# Altium PCB RaspberryPi.PcbDoc
Units mm, origin at the board's own origin, x right, y up, seen from the top; angles counter-clockwise.
Board outline 66 x 57.75 mm, 2 copper layers (Top Layer, Bottom Layer), stack 1.532 mm thick; 53 components, 56 nets, 340 pads, 188 vias.
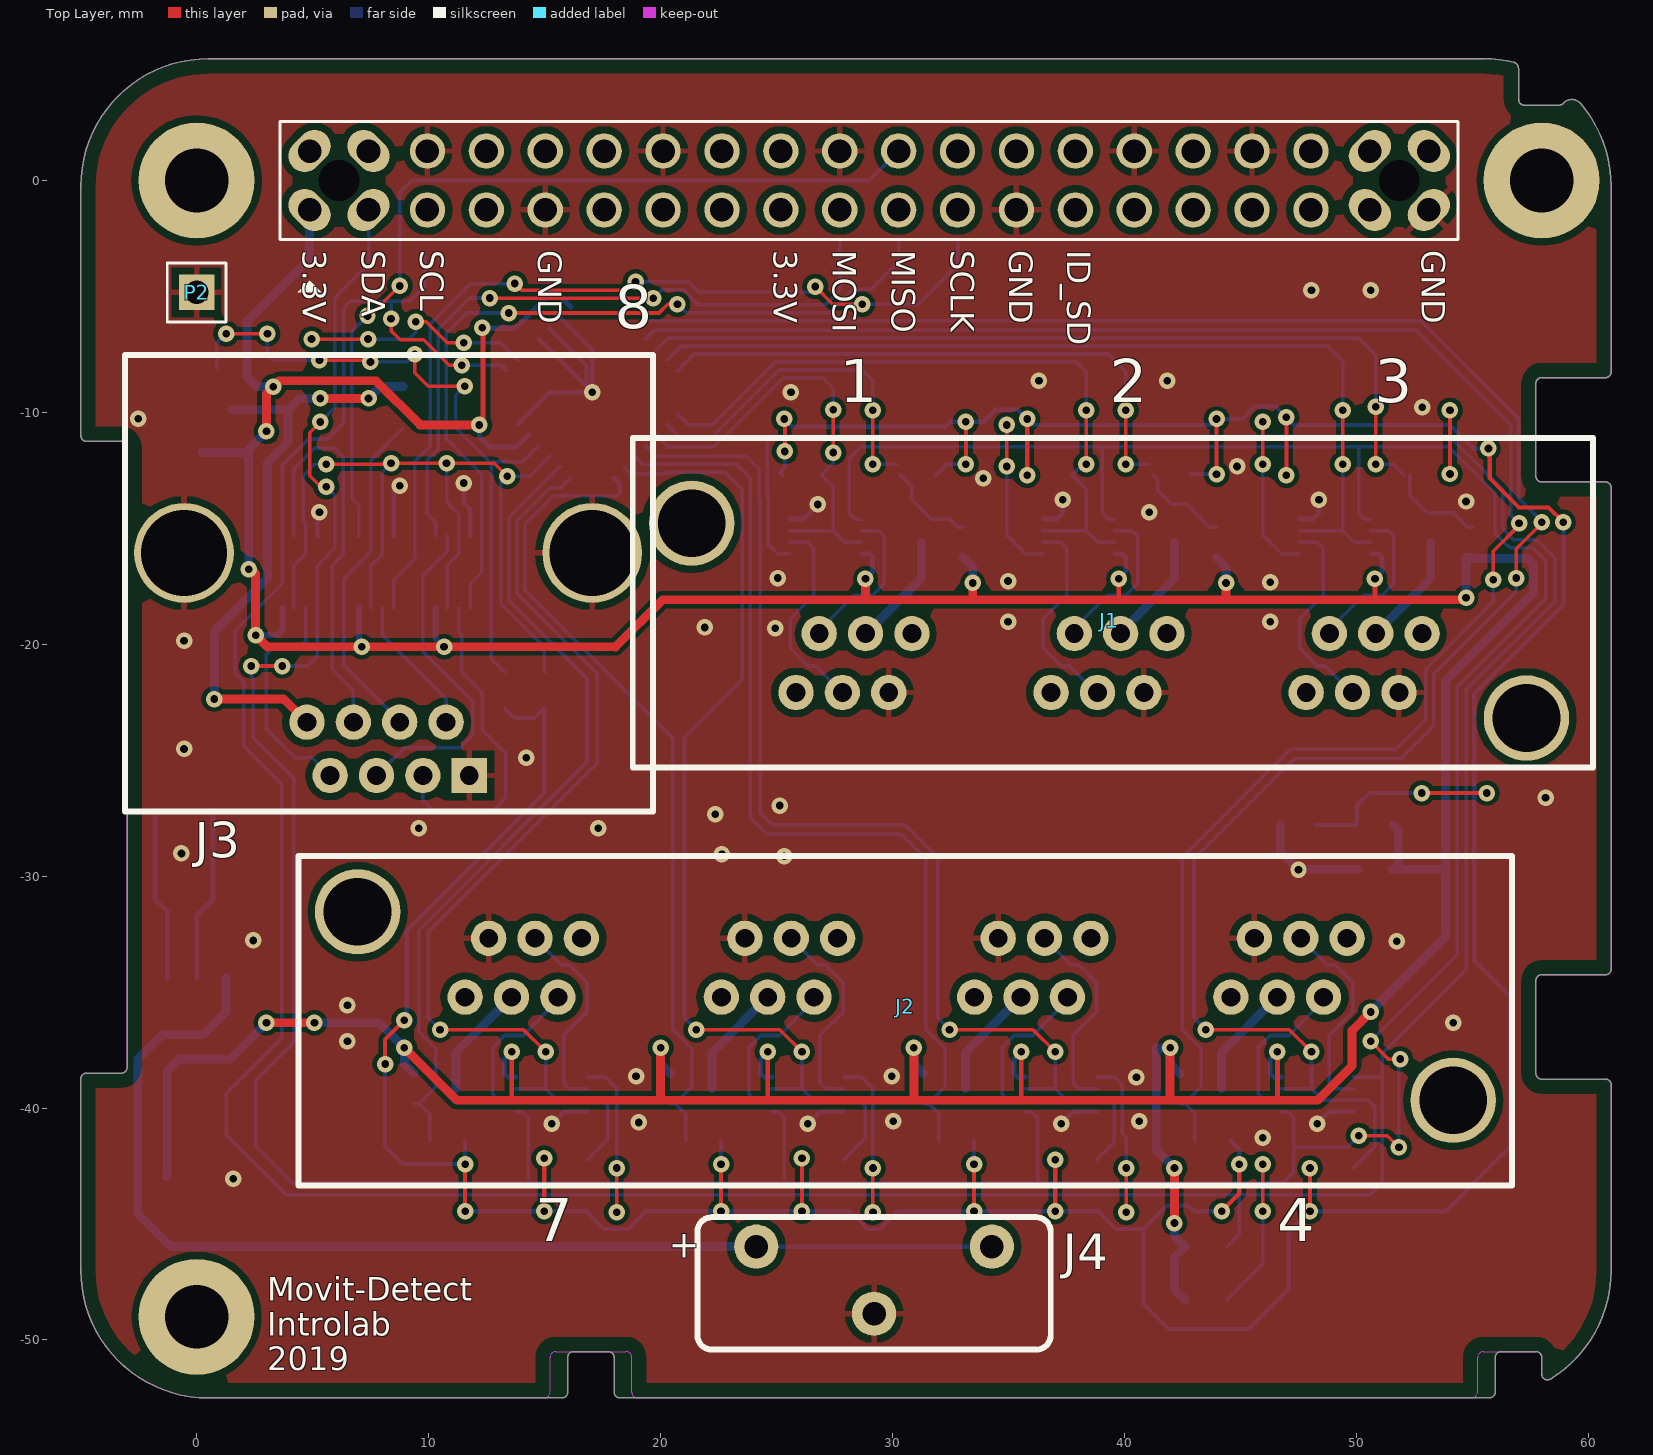
[diagram p0: Top Layer view]
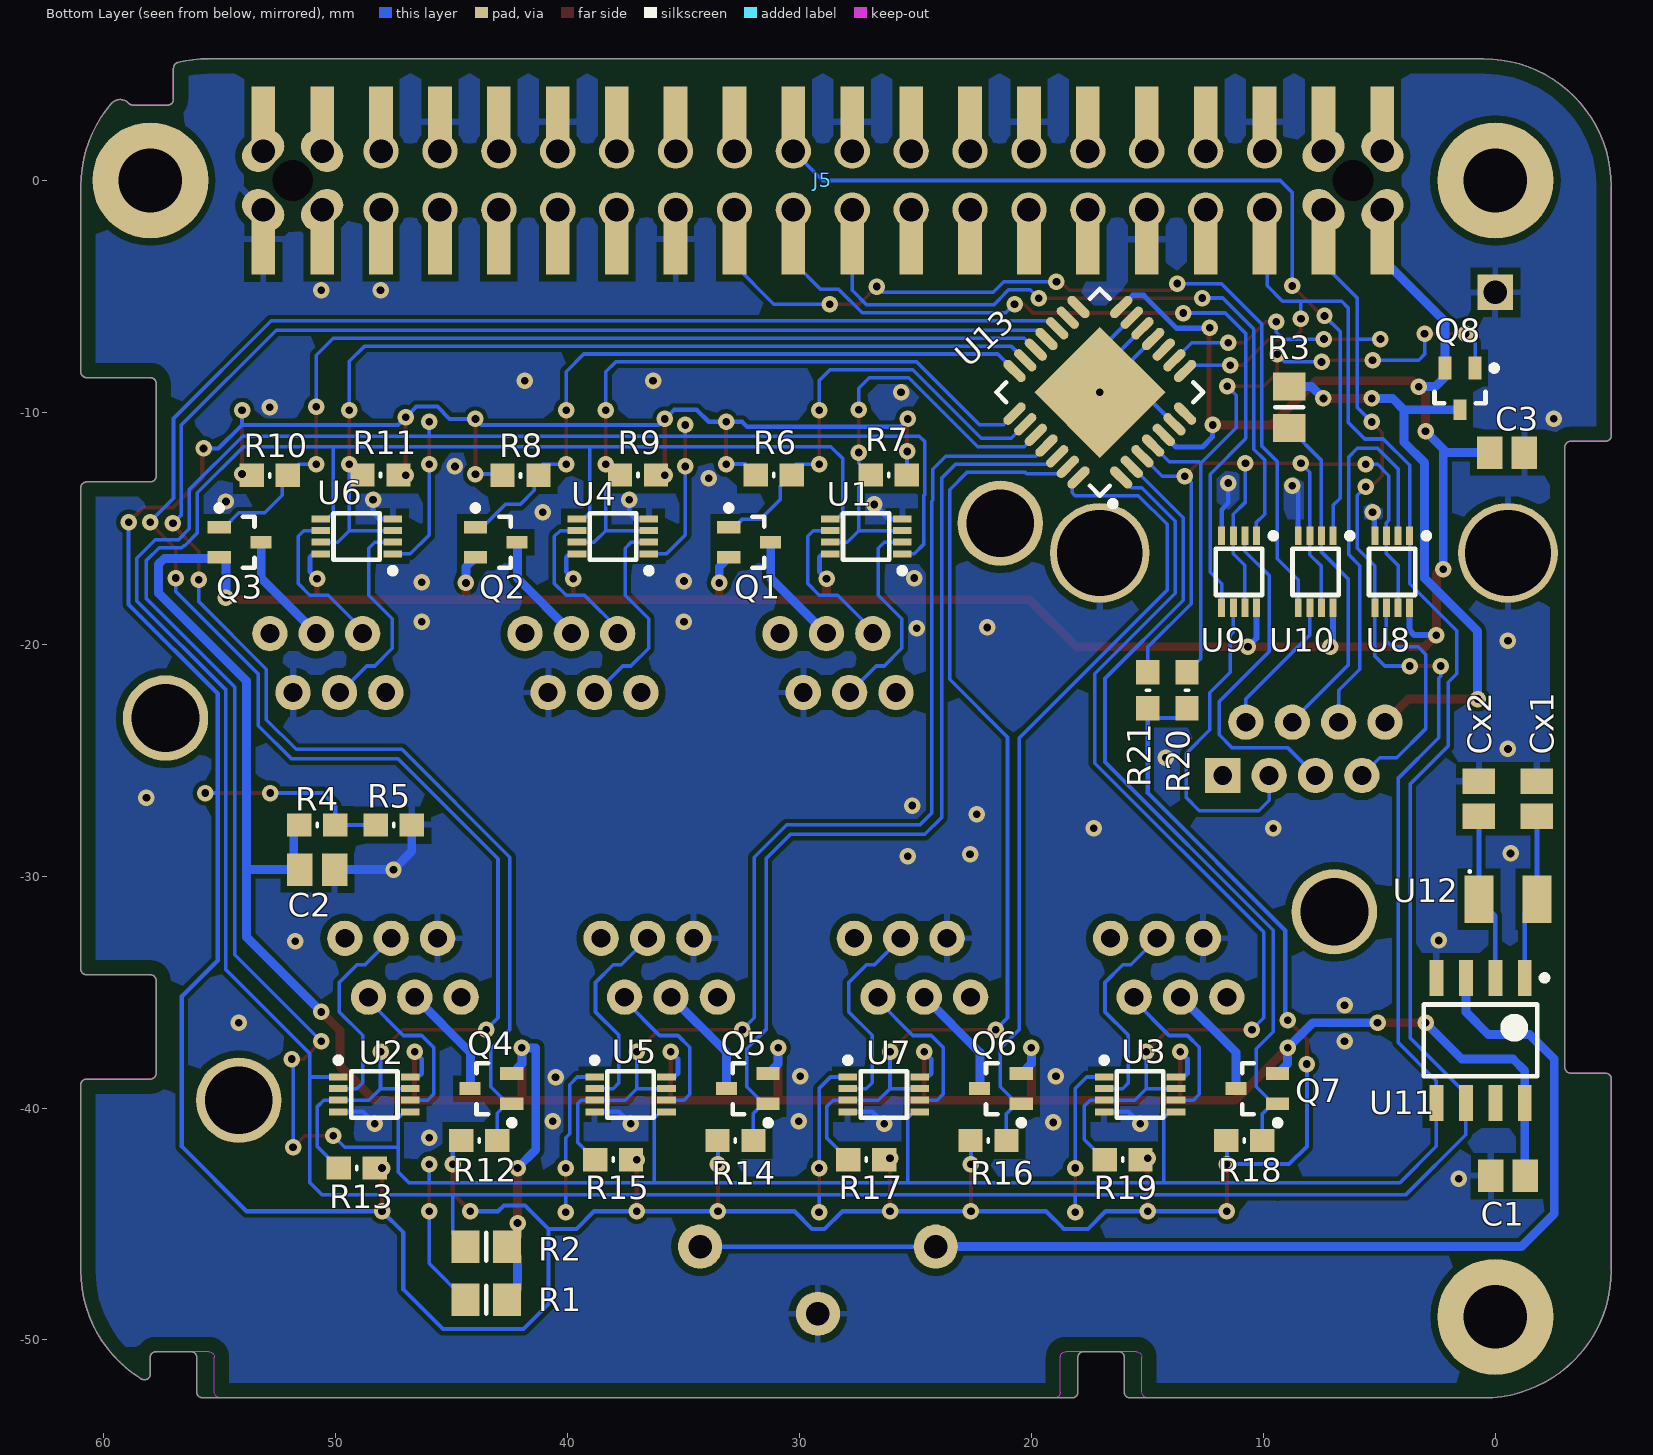
[diagram p1: Bottom Layer view, seen from below]
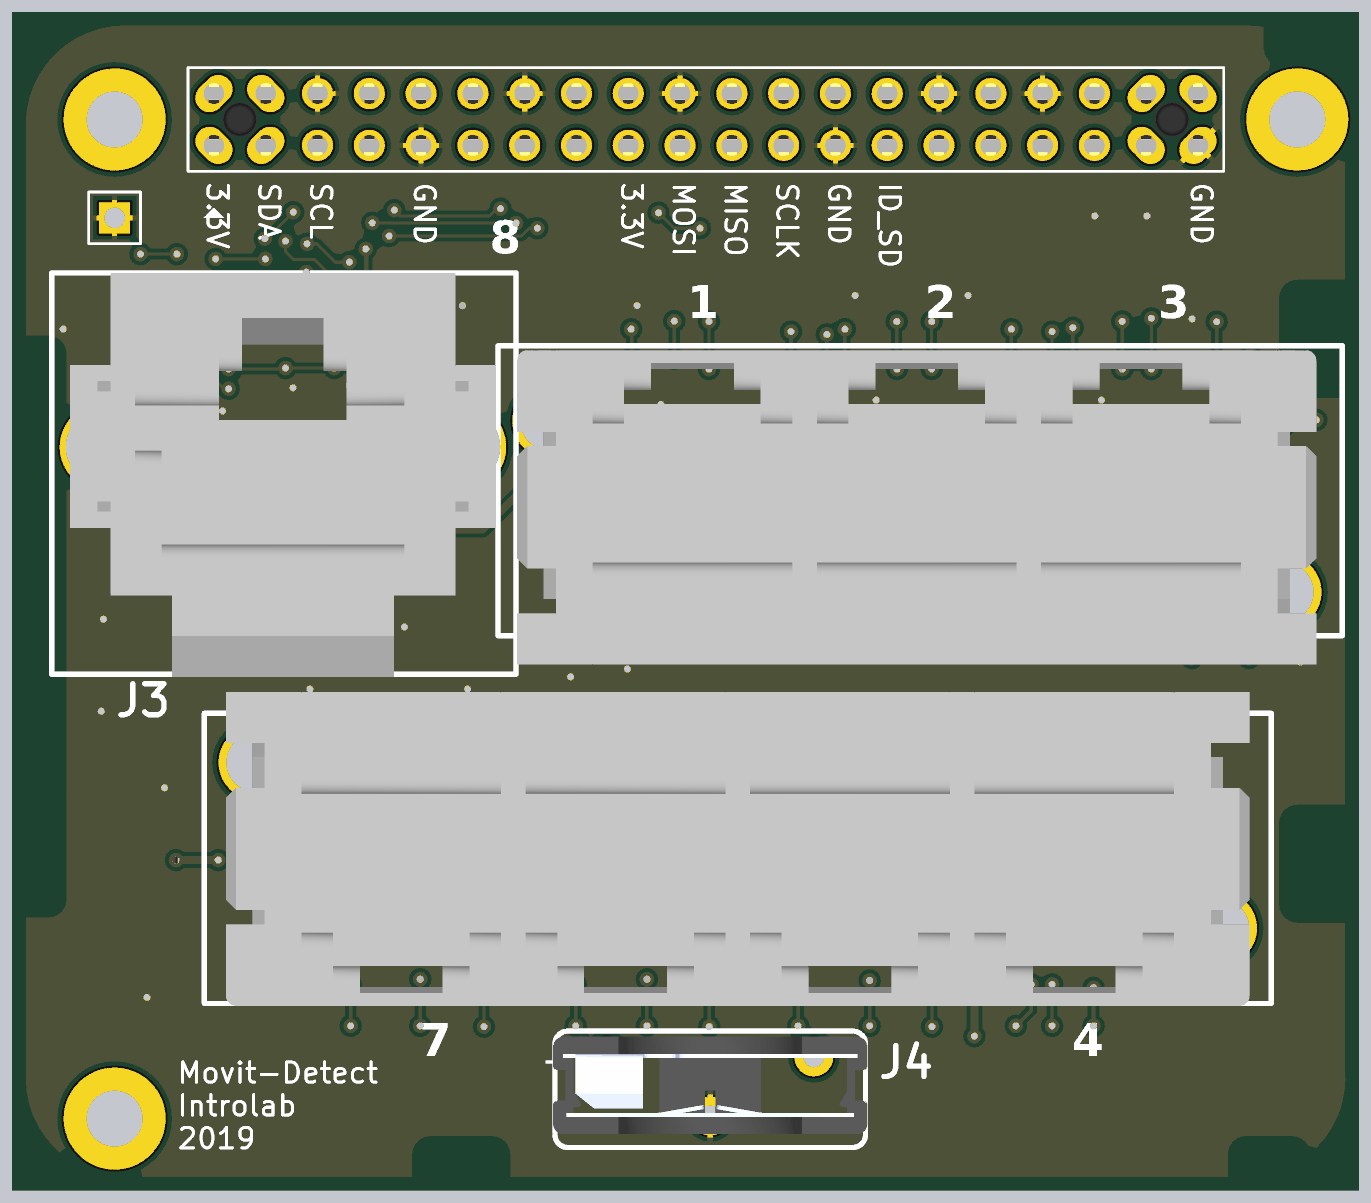
[diagram p2: 3D render of the assembled board from above, using the file's embedded part models]

## Layer stack, top to bottom
Top Solder: solder mask 0.0102, Solder Resist, Dk 3.5
Top Layer: signal copper 0.0356
Dielectric 1: dielectric 1.4605, FR-4, Dk 4.8
Bottom Layer: signal copper 0.0356
Bottom Solder: solder mask 0.0102, Solder Resist, Dk 3.5

## Board outline
0.5,-52.5 15.75,-52.5 ccw(c15.75,-52.25) 16,-52.25 16,-50.75 cw(c16.25,-50.75) 16.25,-50.5 17.75,-50.5 cw(c17.75,-50.75) 18,-50.75 18,-52.25 ccw(c18.25,-52.25) 18.25,-52.5 55.5,-52.5 ccw(c55.5,-47) 55.762,-52.494 ccw(c55.75,-52.244) 56,-52.244 56,-50.75 cw(c56.25,-50.75) 56.25,-50.5 57.75,-50.5 cw(c57.75,-50.75) 58,-50.75 58,-51.472 ccw(c58.25,-51.472) 58.381,-51.685 ccw(c55.5,-47) 61,-47 61,-39 ccw(c60.75,-39) 60.75,-38.75 58,-38.75 cw(c58,-38.5) 57.75,-38.5 57.75,-34.5 cw(c58,-34.5) 58,-34.25 60.75,-34.25 ccw(c60.75,-34) 61,-34 61,-13.25 ccw(c60.75,-13.25) 60.75,-13 58,-13 cw(c58,-12.75) 57.75,-12.75 57.75,-8.75 cw(c58,-8.75) 58,-8.5 60.75,-8.5 ccw(c60.75,-8.25) 61,-8.25 61,-0.25 ccw(c55.5,-0.25) 59.685,3.319 ccw(c59.304,2.995) 58.935,3.332 cw(c58.75,3.5) 58.75,3.25 57.25,3.25 cw(c57.25,3.5) 57,3.5 57,4.849 ccw(c56.75,4.849) 56.81,5.092 ccw(c55.5,-0.25) 55.5,5.25 0.5,5.25 ccw(c0.5,-0.25) -5,-0.25 -5,-10.995 ccw(c-4.75,-10.995) -4.75,-11.245 -3.25,-11.245 cw(c-3.25,-11.495) -3,-11.495 -3,-38.245 cw(c-3.25,-38.245) -3.25,-38.495 -4.75,-38.495 ccw(c-4.75,-38.745) -5,-38.745 -5,-47 ccw(c0.5,-47)

## Design rules (kind name [scope] priority, off if disabled: settings)
Clearance [InPoly vs OnLayer('Keep-Out Layer')] p1: gap=0.635
Clearance Clearance_1 [All] p2: gap=0.191 except(0.305: SMDPad-Poly THPad-Poly)
HoleSize [All] p1: absolutevalues=TRUE maxlimit=3.5 minlimit=0.025 maxpercent=80.000 minpercent=20.000
MinimumSolderMaskSliver [All] p1: minsoldermaskwidth=0.1
PolygonConnect [IsVia] p1: connectstyle=Direct reliefconductorwidth=0.254 reliefentries=4 polygonreliefangle="90 Angle" airgapwidth=0.254
PolygonConnect PolygonConnect_1 [All] p2: connectstyle=Relief reliefconductorwidth=0.254 reliefentries=4 polygonreliefangle="90 Angle" airgapwidth=0.305
RoomDefinition Switches [InComponentClass('Switches')] p1: confinementstyle=ConfineIn formatcopy=TRUE lockcomponents=FALSE outline -87.066,-152.484 -36.266,-152.484 -36.266,-127.084 -87.066,-127.084
RoomDefinition RaspberryPi [InComponentClass('RaspberryPi')] p2: confinementstyle=ConfineIn formatcopy=TRUE lockcomponents=FALSE outline 65.334,-49.614 127.564,-49.614 127.564,-29.294 65.334,-29.294
RoutingVias [All] p1: holewidth=0.711 width=1.27 viastyle="Through Hole" minholewidth=0.711 minwidth=1.27 maxholewidth=0.711 maxwidth=1.27
SilkToSilkClearance [All] p1: silktosilkclearance=0.1
SilkToSolderMaskClearance [IsPad] p1: minsilkscreentomaskgap=0.1 clearancetoexposedcopper=TRUE
SolderMaskExpansion [All] p1: expansion=0.102
Width [All] p1: maxlimit=2.54 minlimit=0.152 preferedwidth=0.254 minimp=50.000000 maximp=50.000000 favimp=50.000000
26 further rules are at their usual default settings.

## Classes and differential pairs
component class Switches: Q1 Q2 Q3 Q4 Q5 Q6 Q7 Q8 R3 R4 R5 R6 R7 R8 R9 R10 R11 R12 R13 R14 R15 R16 R17 R18 R19 R20 R21 U1 U2 U3 U4 U5 U6 U7 U8 U9 U10 U13
component class RaspberryPi: C1 C2 C3 Cx1 Cx2 J1 J2 J3 J4 J5 P2 R1 R2 TM2RE-2424(50) TM2RE-2424(50)_1 U11 U12

## Components (designator, comment, footprint, x,y, rotation, side; value= is the part's Value field where it differs from the comment)
C1 "Cap 0.1uF" C0805 -0.545,-42.926 r180 bottom
C2 "Cap 0.1uF" C0805 50.8,-29.718 r0 bottom
C3 "Cap 0.1uF" C0805 -0.508,-11.732 r0 bottom
Cx1 "Cap 6pF" C0805 -1.795,-26.66 r90 bottom
Cx2 "Cap 6pF" C0805 0.705,-26.66 r90 bottom
J1 "TM2RE-1818(50)" TM2RE-1818 21.344,-14.78 r0 top
J2 "*" TM2RE-2424 30.56,-35.6 r180 top
J3 "TM3RA-88(50)" TM3RA-88(50) 8.255,-20.86 r0 top locked
J4 "CR12xx battery" BS-1225-PC 24.13,-45.974 r270 top
J5 "??" CONN40_100mils_M20_7812045 4.87,-1.27 r0 top
P2 "CON1" CONN1_100mils 0,-4.826 r180 top
Q1 "MOSFET_P_GDS" SC70_GDS 32.208,-15.599 r180 bottom
Q2 "MOSFET_P_GDS" SC70_GDS 43.13,-15.599 r180 bottom
Q3 "MOSFET_P_GDS" SC70_GDS 54.179,-15.599 r180 bottom
Q4 "MOSFET_P_GDS" SC70_GDS 43.26,-39.16 r0 bottom
Q5 "MOSFET_P_GDS" SC70_GDS 32.211,-39.16 r0 bottom
Q6 "MOSFET_P_GDS" SC70_GDS 21.289,-39.16 r0 bottom
Q7 "MOSFET_P_GDS" SC70_GDS 10.24,-39.16 r0 bottom
Q8 "MOSFET_P_GDS" SC70_GDS 1.524,-8.938 r270 bottom
R1 "Res 10K" 6-0805_N 43.514,-48.26 r180 bottom
R2 "Res 10K" 6-0805_N 43.514,-45.974 r180 bottom
R3 "Res 10K" 6-0805_N 8.89,-9.779 r90 bottom
R4 "Resistor" 0603 50.8,-27.788 r180 bottom
R5 "Resistor" 0603 47.498,-27.788 r180 bottom
R6 "Resistor" 0603 31.115,-12.7 r180 bottom
R7 "Resistor" 0603 26.162,-12.7 r0 bottom
R8 "Resistor" 0603 42.037,-12.715 r180 bottom
R9 "Resistor" 0603 36.97,-12.7 r0 bottom
R10 "Resistor" 0603 52.844,-12.715 r180 bottom
R11 "Resistor" 0603 48.073,-12.7 r0 bottom
R12 "Resistor" 0603 43.815,-41.402 r180 bottom
R13 "Resistor" 0603 49.093,-42.585 r0 bottom
R14 "Resistor" 0603 32.766,-41.402 r180 bottom
R15 "Resistor" 0603 38.044,-42.226 r0 bottom
R16 "Resistor" 0603 21.857,-41.402 r180 bottom
R17 "Resistor" 0603 27.122,-42.226 r0 bottom
R18 "Resistor" 0603 10.821,-41.402 r180 bottom
R19 "Resistor" 0603 16.073,-42.226 r0 bottom
R20 "Resistor" 0603 13.293,-21.987 r90 bottom
R21 "Resistor" 0603 14.986,-21.987 r90 bottom
U1 "TC7WB67CFK,LF" PSOP8 27.128,-15.349 r90 bottom
U2 "TC7WB67CFK,LF" PSOP8 48.34,-39.41 r270 bottom
U3 "TC7WB67CFK,LF" PSOP8 15.32,-39.41 r270 bottom
U4 "TC7WB67CFK,LF" PSOP8 38.05,-15.349 r90 bottom
U5 "TC7WB67CFK,LF" PSOP8 37.291,-39.41 r270 bottom
U6 "TC7WB67CFK,LF" PSOP8 49.099,-15.349 r90 bottom
U7 "TC7WB67CFK,LF" PSOP8 26.369,-39.41 r270 bottom
U8 "TC7WB67CFK,LF" PSOP8 4.445,-16.873 r0 bottom
U9 "TC7WB67CFK,LF" PSOP8 11.049,-16.873 r0 bottom
U10 "TC7WB67CFK,LF" PSOP8 7.747,-16.873 r0 bottom
U11 "*" MCP79410 0.635,-37.084 r270 bottom
U12 "*" ECX-31B -0.545,-30.997 r180 bottom
U13 "MCP23S17-E/ML" QFN28-S 17.055,-9.133 r45 bottom

## Footprints (in the part's own frame and the unit in brackets; to place one, negate y for a bottom-side part, rotate by r counter-clockwise, add the part's x,y. Pads: shape width x height; smd on the part's side, far side on the other; paste and mask are expansions set on the pad)
6-0805_N [mm] "Chip Resistor, Body 2.0x1.2mm, IPC Medium Density"
  rect 1.2x1.4 smd: 1(-0.9,0) 2(0.9,0)
  silkscreen extent 0,-0.6 0,0.6, body extent -1.07,-0.7 1.07,0.7, height 0.7
0603 [mm] "Chip Resistor, 2-Leads, Body 1,5x0,8mm, IPC Medium Density"
  rect 1.05x1 smd: 1(-0.775,0) 2(0.775,0)
  silkscreen extent 0,-0.08 0,0.08, body extent -0.85,-0.48 0.85,0.47, height 0.55
BS-1225-PC [mil] "Battery holder 12mm coin cell vertical"
  round 75 hole 40: +(0,400) +(0,0) -(114,200)
  silkscreen extent -50,-100 175,500, body extent -39,-104 149,504, height 552
C0805 [mm] "Chip Capacitor, Body 2.0x1.3mm, IPC High Density"
  rect 1.1x1.4 smd: 1(-0.75,0) 2(0.75,0)
  body extent -1.1,-0.72 1.1,0.72, height 1.4
CONN1_100mils [mil]
  rect 60x60 hole 40 mask+4.72: 1(0,0)
  silkscreen extent -50,-50 50,50, body extent -50,-50 50,50, height 219
CONN40_100mils_M20_7812045 [mil] "SMT, pass-through header M20-7812045"
  rect 40.16x120.08 smd far side paste+0 mask+4: 1(0,-49.57) 2(0,149.57) 3(100,-49.57) 4(100,149.57) 5(200,-49.57) 6(200,149.57) 7(300,-49.57) 8(300,149.57) 9(400,-49.57) 10(400,149.57) 11(500,-49.57) 12(500,149.57) 13(600,-49.57) 14(600,149.57) 15(700,-49.57) 16(700,149.57) 17(800,-49.57) 18(800,149.57) 19(900,-49.57) 20(900,149.57) 21(1000,-49.57) 22(1000,149.57) 23(1100,-49.57) 24(1100,149.57) 25(1200,-49.57) 26(1200,149.57) 27(1300,-49.57) 28(1300,149.57) 29(1400,-49.57) 30(1400,149.57) 31(1500,-49.57) 32(1500,149.57) 33(1600,-49.57) 34(1600,149.57) 35(1700,-49.57) 36(1700,149.57) 37(1800,-49.57) 38(1800,149.57) 39(1900,-49.57) 40(1900,149.57)
  oval 55x78.74 hole 40 rot 45 mask+4.72: 1(0,0) 4(100,100) 37(1800,0) 40(1900,100)
  oval 55x78.74 hole 40 rot 135 mask+4.72: 2(0,100) 3(100,0) 38(1800,100) 39(1900,0)
  round 60 hole 40 mask+4.72: 5(200,0) 6(200,100) 7(300,0) 8(300,100) 9(400,0) 10(400,100) 11(500,0) 12(500,100) 13(600,0) 14(600,100) 15(700,0) 16(700,100) 17(800,0) 18(800,100) 19(900,0) 20(900,100) 21(1000,0) 22(1000,100) 23(1100,0) 24(1100,100) 25(1200,0) 26(1200,100) 27(1300,0) 28(1300,100) 29(1400,0) 30(1400,100) 31(1500,0) 32(1500,100) 33(1600,0) 34(1600,100) 35(1700,0) 36(1700,100)
  rect 0x0 hole 69.29 unplated mask+4.72: ""(50,50) ""(1850,50)
  silkscreen extent -50,-140 1950,150, body extent -50,-92 1950,192, height 147
ECX-31B [mm] "Crystal at 32.768Hz"
  rect 1.25x2.05 smd: 1(-1.25,0) 2(1.25,0)
  silkscreen extent -1.7,1.15 -1.6,1.25, body extent -1.85,-1 1.85,1, height 0.9
MCP79410 [mm] "RTC"
  rect 1.55x0.6 smd mask+0.05: 1(-2.7,1.905) 2(-2.7,0.635) 3(-2.7,-0.635) 4(-2.7,-1.905) 5(2.7,-1.905) 6(2.7,-0.635) 7(2.7,0.635) 8(2.7,1.905)
  silkscreen extent -2.82,-2.45 1.55,2.88, body extent -3.01,-2.45 3.01,2.45, height 1.75
PSOP8 [mm] "Texas Instruments DCU package"
  rect 0.3x0.8 smd mask+0.05: 1(-0.75,-1.55) 2(-0.25,-1.55) 3(0.25,-1.55) 4(0.75,-1.55) 5(0.75,1.55) 6(0.25,1.55) 7(-0.25,1.55) 8(-0.75,1.55)
  silkscreen extent -1.6,-1.67 1,1, body extent -1,-1 1,1, height 0.9
QFN28-S [mm] "0.65-mm pitch, Microchip PIC24HJ64GP202-I/MM"
  oval 1.2x0.4 smd mask+0.04: 1(-3.25,1.95) 2(-3.25,1.3) 3(-3.25,0.65) 4(-3.25,0) 5(-3.25,-0.65) 6(-3.25,-1.3) 7(-3.25,-1.95) 15(3.25,-1.95) 16(3.25,-1.3) 17(3.25,-0.65) 18(3.25,0) 19(3.25,0.65) 20(3.25,1.3) 21(3.25,1.95)
  oval 0.4x1.2 smd mask+0.04: 8(-1.95,-3.25) 9(-1.3,-3.25) 10(-0.65,-3.25) 11(0,-3.25) 12(0.65,-3.25) 13(1.3,-3.25) 14(1.95,-3.25) 22(1.95,3.25) 23(1.3,3.25) 24(0.65,3.25) 25(0,3.25) 26(-0.65,3.25) 27(-1.3,3.25) 28(-1.95,3.25)
  rect 4x4 smd: PAD(0,0)
  silkscreen extent -3.92,-3.15 3.15,3.15, body extent -3,-3 3,3, height 1
SC70_GDS [mm]
  rect 0.9x0.55 smd: D(0.95,0)
  rect 1x0.55 smd: G(-0.85,0.65) S(-0.85,-0.65)
  silkscreen extent -0.98,-1.1 0.67,1.6, body extent -0.67,-1.1 0.67,1.1, height 1.1
TM2RE-1818 [mil]
  round 60 hole 32: 1(374.02,-187.4) 2(334.65,-287.4) 3(295.28,-187.4) 4(255.91,-287.4) 5(216.54,-187.4) 6(177.17,-287.4) 7(807.09,-187.4) 8(767.72,-287.4) 9(728.35,-187.4) 10(688.98,-287.4) 11(649.61,-187.4) 12(610.24,-287.4) 13(1240.16,-187.4) 14(1200.79,-287.4) 15(1161.42,-187.4) 16(1122.05,-287.4) 17(1082.68,-187.4) 18(1043.31,-287.4)
  round 145 hole 115: ""(0,0) ""(1417.32,-330.71)
  silkscreen extent -100,-415 1530,145, body extent -63,-470 1480,136, height 630
TM2RE-2424 [mil]
  round 60 hole 32: 1(-552.6,-15) 2(-592.6,-115) 3(-631.3,-15) 4(-671.3,-115) 5(-710,-15) 6(-750,-115) 7(-117.6,-15) 8(-157.6,-115) 9(-196.3,-15) 10(-236.3,-115) 11(-275,-15) 12(-315,-115) 13(312.4,-15) 14(272.4,-115) 15(233.7,-15) 16(193.7,-115) 17(155,-15) 18(115,-115) 19(747.4,-15) 20(707.4,-115) 21(668.7,-15) 22(628.7,-115) 23(590,-15) 24(550,-115)
  round 145 hole 115: ""(-930,160) ""(930,-160)
  silkscreen extent -1030,-255 1030,305, body extent -988,-296 988,310, height 630
TM3RA-88(50) [mm]
  rect 1.524x1.524 hole 0.813: 1(3.5,-4.8)
  round 1.524 hole 0.813: 2(2.5,-2.5) 3(1.5,-4.8) 4(0.5,-2.5) 5(-0.5,-4.8) 6(-1.5,-2.5) 7(-2.5,-4.8) 8(-3.5,-2.5)
  round 4.3 hole 3.7: M(-8.8,4.8) M(8.8,4.8)
  silkscreen extent -11.34,-6.35 11.43,13.33, body extent -10.45,-6.47 10.45,13.33, height 15

## Part data
C1 C2 C3: "Capacitor 0.1uF"
Cx1 Cx2: "Capacitor 6pF"
J1: "Connector MOD JACK 3pos"
J2: library part TM2RE-2424(50), "Connector MOD JACK 4pos"
J3: "Signal Line; Modular; 8 Contacts; 1 Port Through Hole Vertical"
J4: library part CONN_BATT_12mm_VERTICAL, "12mm Battery holder"
J5: "IDC Boxed Header, Straight, PCB Mount, Polarised, 40 Way, 2x20, 0.1\" Pitch"
P2: "TP"
Q1 Q2 Q3 Q4 Q5 Q6 Q7 Q8: "PMOS"
R1 R2 R3: "Resistor 10K"
U1 U2 U3 U4 U5 U6 U7 U8 U9 U10: "Dual analog switch"
U11: library part MCP79410, "RTC"
U12: library part AB38T, "Oscillator 32.7680KHz"
U13: "16-Bit SPI I/O Expander"

## Free pads (board coordinates)
  round 5 hole 2.75: 1(0,-49) 1(0,0) 1(58,0)

## Via types
v1: diameter 0.711, hole 0.33, Top Layer to Bottom Layer, tented top, 188 vias

## Nets (pads, with @x,y where several pads share a name; then routed paths per layer and width w, separated by ;. In a path a pad name is that pad's centre, name@x,y a point inside that pad or via, vN(x,y) a via of type N, cw(c..) or ccw(c..) an arc to the next point about the centre after c; other vN are vias at no path point)
1_CTRL_I2C: R7.2 U1.3 U1.7 U13.24 | length 19.1
  Top Layer w0.152: v1(27.444,-11.732) v1(27.444,-9.888)
  Bottom Layer w0.152: U13.24 20.319,-11.478 22.323,-11.478 25.29,-8.511 26.997,-8.511 27.444,-8.958 v1(27.444,-9.888) ; U1.3@25.565,-15.099 U1.3 27.444,-15.099 ; v1(27.444,-11.732) 27.444,-12.193 R7.2 27.444,-13.207 27.444,-15.099 ; U1.7@28.665,-15.599 27.944,-15.599 27.444,-15.099
1_CTRL_PWR: Q1.G R6.2 U13.23 | length 19.1
  Top Layer w0.152: v1(29.147,-12.24) v1(29.147,-9.906)
  Bottom Layer w0.152: U13.23 20.873,-11.113 22.174,-11.113 25.119,-8.168 28.69,-8.168 29.147,-8.625 v1(29.147,-9.906) ; v1(29.147,-12.24) R6.2@30.161,-12.24 ; R6.2 30.844,-13.204 30.844,-13.764 31.679,-14.599 32.465,-14.599 32.815,-14.949 Q1.G
2_CTRL_I2C: R9.2 U4.3 U4.7 U13.22 | length 29.9
  Top Layer w0.152: v1(38.354,-9.906) 38.354,-12.228 v1(38.366,-12.24)
  Bottom Layer w0.152: U13.22 21.221,-10.541 22.238,-10.541 24.954,-7.825 37.924,-7.825 38.354,-8.255 v1(38.354,-9.906) ; U4.3@36.487,-15.099 U4.3 38.366,-15.099 ; v1(38.366,-12.24) 38.205,-12.24 R9.2 38.366,-13.321 38.366,-15.099 ; U4.7@39.587,-15.599 38.866,-15.599 38.366,-15.099
2_CTRL_PWR: Q2.G R8.2 U13.21 | length 28.9
  Top Layer w0.152: v1(40.069,-12.24) v1(40.069,-9.906)
  Bottom Layer w0.152: U13.21 21.464,-7.482 39.303,-7.482 40.069,-8.247 v1(40.069,-9.906) ; v1(40.069,-12.24) R8.2@41.083,-12.24 ; R8.2 41.445,-12.898 41.445,-13.365 42.05,-13.97 42.694,-13.97 43.673,-14.949 Q2.G
3_CTRL_I2C: R11.2 U6.3 U6.7 U13.20 | length 40.3
  Top Layer w0.152: v1(49.415,-12.24) v1(49.415,-9.906)
  Bottom Layer w0.152: U13.20 20.887,-7.139 48.753,-7.139 49.415,-7.801 v1(49.415,-9.906) ; U6.3@47.536,-15.099 U6.3 49.415,-15.099 ; v1(49.415,-12.24) 49.415,-15.099 ; U6.7@50.636,-15.599 49.915,-15.599 49.415,-15.099
3_CTRL_PWR: Q3.G R10.2 U13.19 | length 41.8
  Top Layer w0.152: v1(50.844,-12.24) v1(50.844,-9.754)
  Bottom Layer w0.152: U13.19 20.311,-6.796 50.11,-6.796 50.844,-7.53 v1(50.844,-9.754) ; v1(50.844,-12.24) 51.594,-12.24 R10.2 ; R10.2@52.311,-12.715 52.311,-13.576 53.068,-14.333 54.185,-14.333 54.801,-14.949 Q3.G
4_CTRL_I2C: R13.2 U2.3 U2.7 U13.17 | length 89.8
  Top Layer w0.152: v1(43.514,-36.616) 47.111,-36.616 v1(48.073,-37.578) ; v1(56.896,-17.145) 56.896,-15.881 58,-14.777 v1(58,-14.732)
  Bottom Layer w0.152: U13.17 19.216,-6.053 52.789,-6.053 57,-10.264 57,-13.706 58.013,-14.719 v1(58,-14.732) ; v1(43.514,-36.616) 43.006,-36.108 43.006,-29.25 47.316,-24.94 51.911,-24.94 53.34,-23.511 53.34,-21.282 56.896,-17.726 v1(56.896,-17.145) ; U2.7@46.777,-39.16 48.073,-39.16 ; v1(48.073,-37.578) 48.073,-39.16 ; R13.2 50.791,-41.662 50.791,-39.932 50.519,-39.66 U2.3 ; U2.3@49.877,-39.66 48.573,-39.66 48.073,-39.16
4_CTRL_PWR: Q4.G R12.2 U13.18 | length 79.9
  Top Layer w0.152: v1(55.916,-17.222) 55.916,-15.982 57.023,-14.875 v1(57.023,-14.78)
  Bottom Layer w0.152: U13.18 19.735,-6.453 52.572,-6.453 56.657,-10.538 56.657,-14.414 v1(57.023,-14.78) ; Q4.G@42.397,-39.81 Q4.G Q4.G@42.593,-39.81 ; R12.2 43.04,-40.225 42.625,-39.81 Q4.G@42.593,-39.81 ; v1(55.916,-17.222) 55.916,-18.155 52.997,-21.075 52.997,-23.247 51.71,-24.534 47.148,-24.534 42.498,-29.183 42.498,-36.612 43.323,-37.437 43.323,-39.08 Q4.G@42.593,-39.81
5_CTRL_I2C: R15.2 U5.3 U5.7 U13.25 | length 49.6
  Top Layer w0.152: v1(32.465,-36.616) 36.062,-36.616 v1(37.024,-37.578)
  Bottom Layer w0.152: U13.25 19.809,-11.887 23.694,-11.887 24.252,-12.446 24.252,-13.786 24.295,-13.828 24.295,-27.276 24.807,-27.788 30.561,-27.788 31.957,-29.183 31.957,-36.108 v1(32.465,-36.616) ; U5.7@35.728,-39.16 37.024,-39.16 ; v1(37.024,-37.578) 37.024,-39.16 ; R15.2 39.576,-41.47 39.576,-39.81 39.426,-39.66 U5.3 ; U5.3@38.828,-39.66 37.524,-39.66 37.024,-39.16
5_CTRL_PWR: Q5.G R14.2 U13.26 | length 41.5
  Bottom Layer w0.152: U13.26 19.233,-12.23 23.279,-12.23 23.876,-12.827 23.876,-27.47 24.6,-28.194 30.393,-28.194 31.449,-29.25 31.449,-36.612 32.274,-37.437 32.274,-39.08 Q5.G@31.544,-39.81 ; Q5.G@31.348,-39.81 Q5.G Q5.G@31.544,-39.81 ; R14.2 31.991,-40.221 31.58,-39.81 Q5.G@31.544,-39.81
6_CTRL_I2C: R17.2 U7.3 U7.7 U13.27 | length 43.6
  Top Layer w0.152: v1(21.543,-36.616) 25.14,-36.616 v1(26.102,-37.578)
  Bottom Layer w0.152: U13.27 18.724,-12.64 20.215,-12.64 20.282,-12.573 22.776,-12.573 23.533,-13.33 23.533,-21.514 21.035,-24.012 21.035,-36.108 v1(21.543,-36.616) ; U7.7@24.806,-39.16 26.102,-39.16 ; v1(26.102,-37.578) 26.102,-39.16 ; R17.2 28.82,-41.303 28.82,-39.926 28.554,-39.66 U7.3 ; U7.3@27.906,-39.66 26.602,-39.66 26.102,-39.16
6_CTRL_PWR: Q6.G R16.2 U13.28 | length 35.7
  Bottom Layer w0.152: U13.28 18.25,-13.086 18.25,-13.462 18.123,-13.589 15.39,-13.589 14.148,-14.831 14.148,-17.659 20.527,-24.039 20.527,-36.612 21.352,-37.437 21.352,-39.08 20.622,-39.81 Q6.G@20.426,-39.81 ; Q6.G@20.636,-39.81 21.082,-40.256 R16.2
7_CTRL_I2C: R19.2 U3.3 U3.7 U13.1 | length 43.2
  Top Layer w0.152: v1(10.494,-36.616) 14.091,-36.616 v1(15.053,-37.578)
  Bottom Layer w0.152: v1(10.494,-36.616) 9.986,-36.108 9.986,-32.409 17.272,-25.123 17.272,-21.269 13.805,-17.801 13.805,-14.689 15.248,-13.246 15.7,-13.246 U13.1 ; U3.7 15.053,-39.16 ; v1(15.053,-37.578) 15.053,-39.16 ; R19.2 17.722,-41.352 17.722,-39.911 17.471,-39.66 U3.3 15.553,-39.66 15.053,-39.16
7_CTRL_PWR: Q7.G R18.2 U13.2 | length 35.4
  Bottom Layer w0.152: Q7.G@9.377,-39.81 Q7.G Q7.G@9.573,-39.81 ; R18.2 10.046,-40.256 9.6,-39.81 Q7.G@9.573,-39.81 ; U13.2 15.659,-12.35 13.462,-14.547 13.462,-18.107 16.831,-21.476 16.831,-25.079 9.573,-32.337 9.573,-35.946 9.579,-35.952 9.579,-36.467 9.573,-36.474 9.573,-36.707 10.303,-37.437 10.303,-39.08 Q7.G@9.573,-39.81
8_CTRL_I2C: R21.2 U8.3 U8.7 U9.3 U9.7 U10.3 U10.7 U13.3 | length 40
  Top Layer w0.152: v1(5.588,-12.24) 8.334,-12.24 v1(8.382,-12.192) v1(10.774,-12.192) 12.828,-12.192 v1(13.386,-12.75)
  Bottom Layer w0.152: U8.7 4.195,-16.589 4.695,-16.089 U8.3 4.695,-14.756 4.589,-14.65 4.589,-12.727 5.076,-12.24 v1(5.588,-12.24) ; U10.7 7.497,-16.633 7.997,-16.133 U10.3 7.997,-12.577 v1(8.382,-12.192) ; v1(10.774,-12.192) 10.774,-13.864 11.299,-14.389 U9.3 11.299,-16.089 10.799,-16.589 U9.7 ; R21.2 14.986,-20.116 13.119,-18.249 13.119,-13.017 v1(13.386,-12.75) 14.357,-12.75 U13.3
8_CTRL_PWR: Q8.G R20.2 U13.4 | length 29.9
  Top Layer w0.152: v1(1.27,-6.604) v1(3.052,-6.604) ; v1(5.295,-7.747) 7.415,-7.747 v1(7.493,-7.825) ; v1(9.398,-7.493) 9.398,-8.286 9.991,-8.879 v1(11.557,-8.879)
  Bottom Layer w0.152: Q8.G 0.874,-7 v1(1.27,-6.604) ; v1(3.052,-6.604) 3.052,-7.497 3.302,-7.747 v1(5.295,-7.747) ; v1(7.493,-7.825) 9.066,-7.825 v1(9.398,-7.493) ; v1(11.557,-8.879) 11.176,-9.26 11.176,-10.668 12.7,-12.192 ; R20.2 12.7,-20.619 12.7,-12.192 ; U13.4 14.06,-12.128 12.764,-12.128 12.7,-12.192
CS: J5.22 U10.1 | length 38.1
  Top Layer w0.152: v1(7.366,-5.842) 7.468,-5.842 v1(8.763,-4.547)
  Bottom Layer w0.152: U10.1 6.997,-14.006 6.693,-13.702 6.693,-6.515 v1(7.366,-5.842) ; v1(8.763,-4.547) 8.763,-0.524 8.755,-0.516 9.271,0 29,0 J5.22@30.27,1.27
CS_8: J3.4 R3.1 U10.2 | length 14.8
  Bottom Layer w0.152: J3.4@8.618,-23.223 8.755,-23.085 8.533,-23.085 6.35,-20.902 6.35,-17.169 7.497,-16.022 U10.2 7.497,-12.072 R3.1
GND: C1.1 C2.1 C3.1 Cx1.2 Cx2.2 J1.2 J1.8 J1.14 J2.2 J2.8 J2.14 J2.20 J3.1 J3.M J4.- J5.6 J5.9 J5.14 J5.20 J5.25 J5.30 J5.34 J5.39 P2.1 R5.2 U1.4 U2.4 U3.4 U4.4 U5.4 U6.4 U7.4 U8.4 U9.4 U10.4 U11.4 U13.6 U13.11 U13.12 U13.13 U13.PAD | length 36.1
  Bottom Layer w0.178: U13.6 15.217,-9.133 v1(17.055,-9.133) ; U13.11 U13.PAD@16.812,-8.89 ; U13.12 16.812,-7.971 U13.PAD@16.812,-8.89 ; U13.13 17.055,-7.294 v1(17.055,-9.133) ; U13.PAD@16.812,-8.89 v1(17.055,-9.133)
  Bottom Layer w0.203: U8.4 5.195,-14.4 v1(5.295,-14.3) ; U10.4 8.497,-13.416 v1(8.755,-13.158) ; v1(11.512,-13.047) 11.512,-13.906 11.799,-14.193 U9.4 ; v1(15.307,-40.672) 15.819,-40.16 U3.4@16.857,-40.16 ; U1.4 26.158,-14.599 v1(26.787,-13.97) ; v1(26.356,-40.672) 26.868,-40.16 U7.4@27.906,-40.16 ; U4.4 37.08,-14.599 37.346,-14.333 v1(37.346,-13.764) ; v1(37.278,-40.672) 37.79,-40.16 U5.4@38.828,-40.16 ; U6.4 48.129,-14.599 48.395,-14.333 v1(48.395,-13.764) ; v1(48.327,-40.672) 48.839,-40.16 U2.4@49.877,-40.16
  Bottom Layer w0.381: R5.2 46.723,-28.928 v1(47.513,-29.718) C2.1
  other v1: 1.581,-43.053 45.974,-41.275 19.064,-40.622 30.037,-40.565 40.64,-40.564 40.524,-38.668 18.947,-38.631 29.971,-38.631 6.501,-37.124 54.185,-36.322 6.501,-35.56 51.756,-32.806 2.445,-32.773 25.332,-29.148 22.65,-29.054 -0.657,-29.021 9.573,-27.94 17.315,-27.94 22.36,-27.33 25.147,-26.953 58.166,-26.615 14.212,-24.892 -0.545,-24.513 -0.545,-19.849 24.943,-19.304 21.908,-19.275 34.988,-19.028 46.292,-19.028 46.3,-17.328 34.988,-17.272 25.061,-17.145 41.083,-14.3 54.737,-13.843 33.919,-12.835 44.861,-12.333 -2.526,-10.279 52.844,-9.779 25.627,-9.133 36.321,-8.636 41.858,-8.636 48.073,-4.735 50.626,-4.735
MISO: J5.21 U9.5 | length 34.8
  Top Layer w0.152: v1(13.462,-5.715) 19.939,-5.715 20.32,-5.334 v1(20.732,-5.334)
  Bottom Layer w0.152: U9.5 11.799,-17.393 12.294,-16.898 12.294,-12.664 10.755,-11.125 10.755,-6.599 11.639,-5.715 v1(13.462,-5.715) ; v1(20.732,-5.334) 21.108,-5.71 27.298,-5.71 28.309,-4.699 29.083,-4.699 30.27,-3.512 J5.21@30.27,-2.529
MISO_8: J3.3 U9.6 | length 14.1
  Bottom Layer w0.152: J3.3 9.755,-26.729 10.204,-27.178 12.767,-27.178 13.335,-26.61 13.335,-24.711 12.315,-23.691 12.315,-22.094 11.43,-21.209 11.43,-19.606 11.299,-19.475 U9.6
MOSI: J5.19 U9.1 | length 30.2
  Top Layer w0.152: v1(12.634,-5.068) 12.646,-5.08 v1(19.685,-5.08) ; J5.19@27.686,-1.27 J5.19@27.73,-1.314
  Bottom Layer w0.152: U9.1 10.299,-14.744 9.95,-14.395 9.95,-12.052 10.412,-11.59 10.412,-6.406 11.75,-5.068 v1(12.634,-5.068) ; v1(19.685,-5.08) 20.053,-4.712 20.99,-4.712 21.354,-5.076 21.354,-5.086 21.635,-5.367 27.098,-5.367 27.73,-4.735 J5.19@27.73,-2.529 ; J5.19@27.686,-1.314 J5.19@27.73,-1.27
MOSI_8: J3.5 U9.2 | length 14.8
  Bottom Layer w0.152: J3.5 8.963,-24.452 11.362,-24.452 11.909,-23.905 11.909,-22.466 9.739,-20.296 9.739,-17.045 10.799,-15.985 U9.2
NetCx1_1: Cx1.1 U11.1 U12.2 | length 7.2
  Bottom Layer w0.203: Cx1.1 U12.2 -1.27,-31.522 U11.1
NetCx2_1: Cx2.1 U11.2 U12.1 | length 7.3
  Bottom Layer w0.203: U11.2 0,-31.702 U12.1 Cx2.1
NetJ4_+: J4.+ U11.3 | length 50.2
  Bottom Layer w0.203: J4.+@24.13,-45.974 J4.+@34.29,-45.974
  Bottom Layer w0.381: U11.3 1.27,-35.854 0.294,-36.83 -1.484,-36.83 -2.54,-37.886 -2.54,-44.552 -1.118,-45.974 J4.+@24.13,-45.974
NetR4_2: R4.2 R5.1 R6.1 R7.1 R8.1 R9.1 R10.1 R11.1 R12.1 R13.1 R14.1 R15.1 R16.1 R17.1 R18.1 R19.1 R20.1 R21.1 | length 200.9
  Top Layer w0.178: v1(8.128,-38.1) 8.128,-37.039 v1(8.957,-36.21) ; v1(11.576,-44.45) v1(11.576,-42.418) ; v1(14.986,-44.45) v1(14.986,-42.164) ; v1(22.612,-44.45) v1(22.612,-42.418) ; v1(25.365,-11.684) v1@25.365,-10.283 ; v1(26.102,-44.45) v1(26.102,-42.164) ; v1(33.171,-12.23) v1(33.171,-10.404) ; v1(33.521,-44.45) v1(33.521,-42.418) ; v1(35.814,-12.715) v1(35.814,-10.283) ; v1(37.024,-44.45) v1(37.024,-42.224) ; v1(43.98,-12.662) v1(43.98,-10.283) ; v1(44.196,-44.45) 44.958,-43.688 v1(44.958,-42.418) ; v1(46.99,-12.715) v1(46.99,-10.213) ; v1(48.006,-44.45) v1(48.006,-42.585) ; v1(52.832,-26.416) v1(55.626,-26.416) ; v1(54.044,-12.657) v1(54.044,-9.915) ; v1(55.705,-11.557) 55.758,-11.557 55.758,-12.832 57.023,-14.097 58.298,-14.097 v1(58.933,-14.732)
  Bottom Layer w0.178: v1(8.128,-38.1) 8.128,-41.656 8.89,-42.418 v1(11.576,-42.418) R18.1@11.576,-41.422 ; v1(8.957,-36.21) 9.059,-36.108 9.059,-32.348 14.986,-26.421 R21.1 14.568,-23.18 13.711,-23.18 R20.1 ; v1(11.576,-44.45) v1(14.986,-44.45) 16.801,-44.45 17.563,-45.212 18.608,-45.212 19.37,-44.45 v1(22.612,-44.45) v1(26.102,-44.45) 28.159,-44.45 28.921,-45.212 29.463,-45.212 30.225,-44.45 v1(33.521,-44.45) v1(37.024,-44.45) 38.862,-44.45 39.624,-45.212 40.829,-45.212 ; v1(22.612,-42.418) R16.1@22.612,-41.422 ; R7.1@25.26,-12.7 25.147,-12.587 25.365,-12.37 v1(25.365,-11.684) ; v1(25.332,-10.283) 25.671,-10.622 32.258,-10.622 32.475,-10.404 v1(33.171,-10.404) 33.919,-10.404 34.435,-9.888 35.419,-9.888 v1(35.814,-10.283) 36.072,-10.541 43.722,-10.541 v1(43.98,-10.283) 45.089,-10.283 45.618,-9.754 46.53,-9.754 v1(46.99,-10.213) 47.318,-10.541 54.054,-10.541 55.07,-11.557 v1(55.705,-11.557) ; R6.1 32.36,-12.23 v1(33.171,-12.23) ; v1(33.521,-42.418) R14.1@33.521,-41.422 ; R8.1@42.865,-12.662 v1(43.98,-12.662) ; v1(44.196,-44.45) 43.006,-44.45 42.752,-44.196 41.845,-44.196 40.829,-45.212 ; R12.1 44.958,-41.77 v1(44.958,-42.418) ; R5.1 R4.2 50.025,-26.958 50.567,-26.416 v1(52.832,-26.416) ; 54.044,-10.514 v1(54.044,-9.915) ; v1(55.626,-26.416) 55.093,-26.416 ; v1(58.933,-14.732) 58.933,-18.278 55.093,-22.118 55.093,-26.416 ; 40.829,-45.212 40.829,-48.449 41.91,-49.53 45.377,-49.53 47.09,-47.817 47.09,-45.366 v1(48.006,-44.45) 53.848,-44.45 56.642,-41.656 56.642,-35.179 55.093,-33.63 55.093,-26.416
SCL: J5.5 R2.1 U1.1 U2.1 U3.1 U4.1 U5.1 U6.1 U7.1 U8.1 U11.6 U13.8 | length 217
  Top Layer w0.152: v1(8.382,-5.969) 8.382,-6.477 8.776,-6.871 9.792,-6.871 10.892,-7.971 v1(11.43,-7.971) ; v1(18.114,-44.49) v1(18.114,-42.585) ; v1(29.163,-44.49) v1(29.163,-42.585) ; v1(34.925,-12.333) v1(34.925,-10.541) ; v1(40.085,-44.49) v1(40.085,-42.585) ; v1(45.974,-12.24) v1(45.974,-10.404)
  Bottom Layer w0.152: v1(8.382,-5.969) 8.382,-5.207 ; 9.377,-43.741 9.39,-43.728 ; J5.5@9.835,-3.259 9.835,-4.547 9.175,-5.207 6.628,-5.207 6.35,-5.485 6.35,-10.425 5.627,-11.148 4.826,-11.148 3.695,-12.279 U8.1 3.695,-17.384 1.661,-19.418 1.661,-21.267 2.032,-21.638 2.032,-24.384 3.678,-26.03 3.678,-36.962 1.27,-39.37 U11.6 1.27,-41.148 3.85,-43.728 18.114,-43.728 ; v1(11.43,-7.971) 13.238,-7.971 13.187,-8.022 U13.8 ; U3.1 17.618,-38.66 18.114,-39.156 v1(18.114,-42.585) ; v1(18.114,-44.49) 18.114,-43.728 ; U1.1@25.565,-16.099 25.061,-16.099 24.638,-15.676 24.638,-13.569 24.595,-13.526 24.595,-11.273 24.838,-11.031 34.925,-11.031 ; U7.1 28.667,-38.66 29.163,-39.156 v1(29.163,-42.585) ; v1(29.163,-44.49) 29.163,-43.728 ; v1(34.925,-12.333) 34.925,-15.285 35.739,-16.099 U4.1@36.487,-16.099 ; v1(34.925,-10.541) 34.925,-11.031 ; U5.1 39.589,-38.66 39.918,-38.989 39.918,-41.108 40.085,-41.275 v1(40.085,-42.585) ; v1(40.085,-44.49) 40.085,-43.728 ; R2.1 44.958,-45.43 44.958,-43.728 ; v1(45.974,-12.24) 45.974,-15.285 46.788,-16.099 U6.1@47.536,-16.099 ; v1(45.974,-10.404) 45.974,-11.031 ; U2.1 51.134,-38.66 ; 18.114,-43.728 29.163,-43.728 ; 29.163,-43.728 40.085,-43.728 ; 34.925,-11.031 45.974,-11.031 ; 40.085,-43.728 44.958,-43.728 ; 44.958,-43.728 50.61,-43.728 51.134,-43.204 51.134,-38.66 ; 45.974,-11.031 54.021,-11.031 56.314,-13.324 56.314,-15.025 56.783,-15.494 57.785,-15.494 58.577,-16.286 58.577,-18.131 54.737,-21.971 54.737,-34.029 51.134,-37.632 51.134,-38.66
SCL1: J1.4 U1.2 | length 8.9
  Bottom Layer w0.152: U1.2@25.565,-15.599 26.349,-15.599 26.603,-15.853 26.603,-17.893 25.591,-18.905 25.591,-20.175 26.353,-20.937 26.701,-20.937 J1.4
SCL2: J1.10 U4.2 | length 8.9
  Bottom Layer w0.152: U4.2@36.487,-15.599 37.271,-15.599 37.525,-15.853 37.525,-17.893 36.513,-18.905 36.513,-20.175 37.275,-20.937 37.623,-20.937 J1.10@38.766,-22.08
SCL3: J1.16 U6.2 | length 8.9
  Bottom Layer w0.152: U6.2@47.536,-15.599 48.32,-15.599 48.574,-15.853 48.574,-17.893 47.562,-18.905 47.562,-20.175 48.324,-20.937 48.672,-20.937 J1.16@49.815,-22.08
SCL4: J2.4 U2.2 | length 8.9
  Bottom Layer w0.152: J2.4@47.598,-32.679 48.741,-33.822 49.089,-33.822 49.851,-34.584 49.851,-35.854 48.839,-36.866 48.839,-38.906 49.093,-39.16 U2.2@49.877,-39.16
SCL5: J2.10 U5.2 | length 8.9
  Bottom Layer w0.152: J2.10@36.549,-32.679 37.692,-33.822 38.04,-33.822 38.802,-34.584 38.802,-35.854 37.79,-36.866 37.79,-38.906 38.044,-39.16 U5.2@38.828,-39.16
SCL6: J2.16 U7.2 | length 8.9
  Bottom Layer w0.152: J2.16@25.627,-32.679 26.77,-33.822 27.118,-33.822 27.88,-34.584 27.88,-35.854 26.868,-36.866 26.868,-38.906 27.122,-39.16 U7.2@27.906,-39.16
SCL7: J2.22 U3.2 | length 8.9
  Bottom Layer w0.152: J2.22@14.578,-32.679 15.721,-33.822 16.069,-33.822 16.831,-34.584 16.831,-35.854 15.819,-36.866 15.819,-38.906 16.073,-39.16 U3.2@16.857,-39.16
SCL8: J3.6 U8.2 | length 17.5
  Bottom Layer w0.152: U8.2 4.195,-12.438 5.079,-11.554 5.949,-11.554 6.318,-11.923 6.318,-16.131 5.842,-16.607 5.842,-21.074 6.755,-21.987 J3.6
SCLK: J5.23 U10.5 | length 39
  Top Layer w0.152: v1(13.716,-4.445) 14.008,-4.737 18.377,-4.737 18.745,-4.369 v1(18.923,-4.369) ; v1(26.67,-4.572) 27.432,-5.334 v1(28.702,-5.334)
  Bottom Layer w0.152: U10.5 8.497,-17.215 9.398,-16.314 9.398,-12.119 10.066,-11.451 10.066,-6.19 11.811,-4.445 v1(13.716,-4.445) ; v1(18.923,-4.369) 21.19,-4.369 21.647,-4.826 26.416,-4.826 v1(26.67,-4.572) ; v1(28.702,-5.334) 31.115,-5.334 32.81,-3.639 J5.23@32.81,-2.529
SCLK_8: J3.2 U10.6 | length 6.1
  Bottom Layer w0.152: U10.6 7.997,-19.602 10.755,-22.36 J3.2
SDA: J5.3 R1.1 U1.5 U2.5 U3.5 U4.5 U5.5 U6.5 U7.5 U8.5 U11.5 U13.9 | length 201.5
  Top Layer w0.152: v1(2.347,-20.937) v1(3.695,-20.937) ; v1(4.953,-6.838) 4.953,-6.946 5.061,-6.838 v1(7.39,-6.838) ; v1(5.334,-10.414) 4.874,-10.874 4.874,-12.727 5.355,-13.208 v1(5.588,-13.208) ; v1(9.442,-6.096) 9.906,-6.096 10.81,-7 v1(11.512,-7) ; v1(45.974,-44.45) v1(45.974,-42.418) ; v1(50.118,-41.188) 51.336,-41.188 v1(51.844,-41.696) ; v1(50.626,-37.124) 51.388,-37.886 v1(51.896,-37.886)
  Bottom Layer w0.152: v1(2.347,-20.937) 2.347,-21.378 2.438,-21.47 2.438,-24.028 4.195,-25.785 4.195,-37.168 2.54,-38.823 U11.5 2.54,-41.648 4.112,-43.22 25.34,-43.22 ; v1(3.695,-20.937) 4.765,-20.937 5.195,-20.507 U8.5 5.195,-16.62 5.949,-15.866 5.949,-13.569 v1(5.588,-13.208) ; v1(4.953,-6.838) 5.949,-6.838 ; v1(5.334,-10.414) 5.956,-9.792 5.956,-9.14 5.949,-9.133 5.949,-5.068 7.41,-3.607 J5.3@7.41,-1.27 ; v1(7.39,-6.838) 9.156,-6.838 9.442,-6.552 v1(9.442,-6.096) ; v1(11.512,-7) 13.084,-7 U13.9 ; U3.5@13.757,-40.16 14.025,-40.16 14.291,-40.426 14.291,-43.22 ; U7.5@24.806,-40.16 25.074,-40.16 25.34,-40.426 25.34,-43.22 ; U1.5@28.665,-14.599 28.397,-14.599 28.131,-14.333 28.131,-12.003 28.656,-11.478 39.053,-11.478 ; U5.5@35.728,-40.16 35.996,-40.16 36.262,-40.426 36.262,-43.22 ; U4.5@39.587,-14.599 39.319,-14.599 39.053,-14.333 39.053,-11.478 ; R1.1 45.974,-46.7 v1(45.974,-44.45) ; v1(45.974,-42.418) 45.974,-43.22 ; U2.5@46.777,-40.16 47.045,-40.16 47.311,-40.426 47.311,-41.696 ; v1(50.118,-41.188) 49.61,-41.696 47.311,-41.696 ; v1(50.626,-37.124) 54.356,-33.394 54.356,-21.844 58.166,-18.034 58.166,-16.383 57.62,-15.837 56.641,-15.837 56.552,-15.748 56.515,-15.748 55.971,-15.204 55.971,-13.466 53.983,-11.478 50.102,-11.478 ; U6.5@50.636,-14.599 50.368,-14.599 50.102,-14.333 50.102,-11.478 ; v1(51.844,-41.696) 51.844,-37.834 v1(51.896,-37.886) ; 25.34,-43.22 36.262,-43.22 ; 36.262,-43.22 45.974,-43.22 ; 39.053,-11.478 50.102,-11.478 ; 45.974,-43.22 46.847,-43.22 47.311,-42.756 47.311,-41.696
SDA1: J1.5 U1.6 | length 6.9
  Bottom Layer w0.152: J1.5@26.861,-19.54 26.861,-19.38 28.352,-17.889 29.147,-17.889 29.655,-17.381 29.655,-15.349 29.405,-15.099 U1.6@28.665,-15.099
SDA2: J1.11 U4.6 | length 6.9
  Bottom Layer w0.152: J1.11@37.783,-19.54 37.783,-19.38 39.274,-17.889 40.069,-17.889 40.577,-17.381 40.577,-15.349 40.327,-15.099 U4.6@39.587,-15.099
SDA3: J1.17 U6.6 | length 6.9
  Bottom Layer w0.152: J1.17@48.832,-19.54 48.832,-19.38 50.323,-17.889 51.118,-17.889 51.626,-17.381 51.626,-15.349 51.376,-15.099 U6.6@50.636,-15.099
SDA4: J2.5 U2.6 | length 6.9
  Bottom Layer w0.152: U2.6@46.777,-39.66 46.037,-39.66 45.787,-39.41 45.787,-37.378 46.295,-36.87 47.09,-36.87 48.581,-35.379 J2.5@48.581,-35.219
SDA5: J2.11 U5.6 | length 6.9
  Bottom Layer w0.152: U5.6@35.728,-39.66 34.988,-39.66 34.738,-39.41 34.738,-37.378 35.246,-36.87 36.041,-36.87 37.532,-35.379 J2.11@37.532,-35.219
SDA6: J2.17 U7.6 | length 6.9
  Bottom Layer w0.152: U7.6@24.806,-39.66 24.066,-39.66 23.816,-39.41 23.816,-37.378 24.324,-36.87 25.119,-36.87 26.61,-35.379 J2.17@26.61,-35.219
SDA7: J2.23 U3.6 | length 6.9
  Bottom Layer w0.152: U3.6@13.757,-39.66 13.017,-39.66 12.767,-39.41 12.767,-37.378 13.275,-36.87 14.07,-36.87 15.561,-35.379 J2.23@15.561,-35.219
SDA8: J3.7 U8.6 | length 10.2
  Bottom Layer w0.152: U8.6 4.695,-19.864 4.445,-20.114 3.323,-20.114 3.009,-20.428 3.009,-23.651 4.25,-24.892 4.987,-24.892 J3.7
VCC: C1.2 C2.2 C3.2 J5.1 Q1.S Q2.S Q3.S Q4.S Q5.S Q6.S Q7.S Q8.S R1.2 R2.2 R4.1 U1.8 U2.8 U3.8 U4.8 U5.8 U6.8 U7.8 U8.8 U9.8 U10.8 U11.8 U13.5 U13.14 | length 247.3
  Top Layer w0.203: 13.542,-39.664 13.583,-39.623 v1(13.583,-37.578) ; v1(24.632,-37.578) 24.632,-39.578 24.718,-39.664 ; v1(35.554,-37.578) 35.554,-39.578 35.64,-39.664 ; 39.632,-18.082 39.761,-17.953 v1(39.761,-17.181) ; 46.562,-39.664 46.603,-39.623 v1(46.603,-37.578) ; 50.808,-18.082 50.81,-18.08 v1(50.81,-17.181)
  Top Layer w0.229: v1(12.192,-10.541) 12.344,-10.389 12.344,-6.375 v1(12.319,-6.35)
  Top Layer w0.381: v1(2.248,-16.764) 2.347,-16.764 2.54,-16.957 v1(2.54,-19.606) 3.048,-20.114 3.052,-20.11 v1(7.112,-20.11) v1(10.668,-20.11) 18.055,-20.11 18.059,-20.114 20.091,-18.082 28.839,-18.082 ; v1(3.009,-36.322) v1(5.08,-36.322) ; v1(3.009,-10.82) 3.009,-9.183 v1(3.302,-8.89) 3.556,-8.636 7.728,-8.636 9.633,-10.541 v1(12.192,-10.541) ; v1(8.957,-37.403) 11.218,-39.664 13.542,-39.664 19.892,-39.664 ; v1(20.006,-37.403) 20.006,-39.55 19.892,-39.664 ; v1(28.839,-17.181) 28.839,-18.082 ; v1(30.928,-37.403) 30.928,-39.55 30.814,-39.664 ; v1(33.465,-17.356) 33.465,-18.011 33.536,-18.082 ; v1(41.977,-37.403) 41.977,-39.651 41.99,-39.664 ; v1(42.164,-44.958) v1(42.164,-42.585) ; v1(44.387,-17.356) 44.387,-18.011 44.458,-18.082 ; v1(50.626,-35.854) 49.826,-36.654 49.826,-38.178 48.34,-39.664 46.562,-39.664 41.99,-39.664 ; v1(54.737,-17.994) 54.737,-18.055 54.71,-18.082 50.808,-18.082 44.458,-18.082 ; 19.892,-39.664 24.718,-39.664 30.814,-39.664 ; 28.839,-18.082 33.536,-18.082 ; 30.814,-39.664 35.64,-39.664 41.99,-39.664 ; 33.536,-18.082 39.632,-18.082 44.458,-18.082
  Bottom Layer w0.203: v1(13.583,-37.578) 13.275,-37.886 13.275,-38.51 13.425,-38.66 U3.8@13.757,-38.66 ; v1(24.632,-37.578) 24.324,-37.886 24.324,-38.51 24.474,-38.66 U7.8@24.806,-38.66 ; U1.8@28.665,-16.099 28.997,-16.099 29.147,-16.249 29.147,-16.873 v1(28.839,-17.181) ; v1(35.554,-37.578) 35.246,-37.886 35.246,-38.51 35.396,-38.66 U5.8@35.728,-38.66 ; U4.8@39.587,-16.099 39.919,-16.099 40.069,-16.249 40.069,-16.873 v1(39.761,-17.181) ; v1(46.603,-37.578) 46.295,-37.886 46.295,-38.51 46.445,-38.66 U2.8@46.777,-38.66 ; U6.8@50.636,-16.099 50.968,-16.099 51.118,-16.249 51.118,-16.873 v1(50.81,-17.181)
  Bottom Layer w0.229: v1(12.192,-10.541) 12.192,-11.053 12.634,-11.495 13.774,-11.495 U13.5 ; v1(12.319,-6.35) 12.344,-6.375 13.738,-6.375 15.16,-4.953 15.633,-4.953 U13.14
  Bottom Layer w0.254: v1(2.54,-19.606) 3.49,-19.606 3.695,-19.401 U8.8 ; U10.8 6.997,-19.995 v1(7.112,-20.11) ; U9.8 10.299,-19.741 v1(10.668,-20.11)
  Bottom Layer w0.381: C1.2 -1.27,-42.901 U11.8 -1.27,-38.394 -0.762,-37.886 1.445,-37.886 v1(3.009,-36.322) ; C3.2 2.097,-11.732 2.248,-11.581 ; v1(2.248,-16.764) 2.248,-11.581 ; v1(3.009,-10.82) 2.248,-11.581 ; v1(3.302,-8.89) 2.587,-8.89 2.174,-8.477 Q8.S 2.174,-6.076 4.87,-3.38 J5.1@4.87,-1.27 ; v1(5.08,-36.322) 7.876,-36.322 v1(8.957,-37.403) 8.957,-38.09 Q7.S@9.377,-38.51 ; v1(20.006,-37.403) 20.006,-38.09 Q6.S@20.426,-38.51 ; v1(30.928,-37.403) 30.928,-38.09 Q5.S@31.348,-38.51 ; Q1.S@33.045,-16.249 33.465,-16.669 v1(33.465,-17.356) ; v1(42.164,-44.958) 42.164,-45.524 R2.2 42.164,-46.424 42.164,-47.81 R1.2 ; v1(42.164,-42.585) 41.377,-41.798 41.377,-37.403 v1(41.977,-37.403) 41.977,-38.09 Q4.S@42.397,-38.51 ; Q2.S@43.967,-16.249 44.387,-16.669 v1(44.387,-17.356) ; v1(50.626,-35.854) 53.848,-32.632 53.848,-21.587 57.651,-17.784 57.651,-16.556 57.389,-16.294 55.074,-16.294 Q3.S 54.737,-16.249 v1(54.737,-17.994) ; R4.1 51.816,-28.029 51.816,-29.452 C2.2 53.848,-29.718
VCC1: J1.3 Q1.D | length 4.9
  Bottom Layer w0.381: J1.3@28.86,-19.54 31.245,-17.155 Q1.D@31.245,-15.599
VCC2: J1.9 Q2.D | length 4.9
  Bottom Layer w0.381: J1.9@39.782,-19.54 42.167,-17.155 Q2.D@42.167,-15.599
VCC3: J1.15 Q3.D | length 4.9
  Bottom Layer w0.381: J1.15@50.831,-19.54 53.216,-17.155 Q3.D@53.216,-15.599
VCC4: J2.3 Q4.D | length 4.9
  Bottom Layer w0.381: Q4.D@44.197,-39.16 44.197,-37.604 J2.3@46.582,-35.219
VCC5: J2.9 Q5.D | length 4.9
  Bottom Layer w0.381: Q5.D@33.148,-39.16 33.148,-37.604 J2.9@35.533,-35.219
VCC6: J2.15 Q6.D | length 4.9
  Bottom Layer w0.381: Q6.D@22.226,-39.16 22.226,-37.604 J2.15@24.611,-35.219
VCC7: J2.21 Q7.D | length 4.9
  Bottom Layer w0.381: Q7.D@11.177,-39.16 11.177,-37.604 J2.21@13.562,-35.219
VCC8: J3.8 Q8.D R3.2 | length 26
  Top Layer w0.381: v1(0.762,-22.36) 3.755,-22.36 J3.8 ; v1(5.334,-9.398) v1(7.41,-9.398)
  Bottom Layer w0.381: v1(0.762,-22.36) 0.762,-19.439 3.048,-17.153 3.048,-12.174 3.943,-11.279 3.943,-9.888 ; Q8.D 3.943,-9.888 ; v1(5.334,-9.398) 4.433,-9.398 3.943,-9.888 ; v1(7.41,-9.398) 7.929,-8.879 R3.2
pads on no net: J1. J1.1 J1.6 J1.7 J1.12 J1.13 J1.18 J2. J2.1 J2.6 J2.7 J2.12 J2.13 J2.18 J2.19 J2.24 J5. J5.2 J5.4 J5.7 J5.8 J5.10 J5.11 J5.12 J5.13 J5.15 J5.16 J5.17 J5.18 J5.24 J5.26 J5.27 J5.28 J5.29 J5.31 J5.32 J5.33 J5.35 J5.36 J5.37 J5.38 J5.40 U11.7 U13.7 U13.10 U13.15 U13.16

## Polygon pours and split planes (outlines as drawn)
GND on Top Layer "GND_L01_P007" (solid, remove dead copper, pour order 7): -5.08,5.08 63.5,5.08 63.5,-53.34 -5.08,-53.34
no net on Top Layer "NONET_L01_P005" (none, pour order 5): -3.5,-52.5
GND on Bottom Layer "GND_L02_P009" (solid, remove dead copper, pour order 9): -5.08,5.08 63.5,5.08 63.5,-53.34 -5.08,-53.34

## Keep-outs
Keep-Out Layer:
  lines w0.002: -5,-47 ccw(c0.5,-47) 0.5,-52.5 14.988,-52.5 ccw(c14.988,-52.25) 15.238,-52.25 15.238,-50.75 cw(c15.488,-50.75) 15.488,-50.5 18.512,-50.5 cw(c18.512,-50.75) 18.762,-50.75 18.762,-52.25 ccw(c19.012,-52.25) 19.012,-52.5 54.738,-52.5 ccw(c54.738,-47) 55,-52.494 ccw(c54.988,-52.244) 55.238,-52.244 55.238,-50.75 cw(c55.488,-50.75) 55.488,-50.5 57.75,-50.5 cw(c57.75,-50.75) 58,-50.75 58,-51.472 ccw(c58.25,-51.472) 58.381,-51.685 ccw(c55.5,-47) 61,-47 61,-39 ccw(c60.75,-39) 60.75,-38.75 58,-38.75 cw(c58,-38.5) 57.75,-38.5 57.75,-34.5 cw(c58,-34.5) 58,-34.25 60.75,-34.25 ccw(c60.75,-34) 61,-34 61,-13.25 ccw(c60.75,-13.25) 60.75,-13 58,-13 cw(c58,-12.75) 57.75,-12.75 57.75,-8.75 cw(c58,-8.75) 58,-8.5 60.75,-8.5 ccw(c60.75,-8.25) 61,-8.25 61,-0.25 ccw(c55.5,-0.25) 59.685,3.319 ccw(c59.304,2.995) 58.935,3.332 cw(c58.75,3.5) 58.75,3.25 57.25,3.25 cw(c57.25,3.5) 57,3.5 57,4.849 ccw(c56.75,4.849) 56.81,5.092 ccw(c55.5,-0.25) 55.5,5.25 0.5,5.25 ccw(c0.5,-0.25) -5,-0.25 -5,-10.995 ccw(c-4.75,-10.995) -4.75,-11.245 -3.25,-11.245 cw(c-3.25,-11.495) -3,-11.495 -3,-38.245 cw(c-3.25,-38.245) -3.25,-38.495 -4.75,-38.495 ccw(c-4.75,-38.745) -5,-38.745 -5,-47

## Silkscreen, mask and mechanical layers (free items; w line width, h text height)
Top Overlay:
  text "3.3V" at 4.57,-3 h1 r270
  text "SDA" at 7.11,-3 h1 r270
  text "SCL" at 9.65,-3 h1 r270
  text "GND" at 14.73,-3 h1 r270
  text "3.3V" at 24.89,-3 h1 r270
  text "MOSI" at 27.43,-3 h1 r270
  text "MISO" at 29.97,-3 h1 r270
  text "SCLK" at 32.51,-3 h1 r270
  text "GND" at 35.05,-3 h1 r270
  text "ID_SD" at 37.54,-3 h1 r270
  text "GND" at 52.83,-3 h1 r270
  text "8" at 18.028,-6.985 h3.17
  text "1" at 27.73,-10.16 h3.17
  text "2" at 39.37,-10.16 h3.17
  text "3" at 50.8,-10.16 h3.17
  text "7" at 14.605,-46.355 h3.17
  text "4" at 46.603,-46.355 h3.17
  text "Movit-Detect / Introlab / 2019" at 3.052,-51.308 h1
Mechanical 13:
  circle w0.001: c28,-23.625 r0.001
  lines w0.002: -4.5,-46.5 ccw(c1,-46.5) 1,-52 55,-52 ccw(c55,-46.5) 60.5,-46.5 60.5,-0.75 ccw(c55,-0.75) 55,4.75 1,4.75 ccw(c1,-0.75) -4.5,-0.75 -4.5,-46.5 ; 58,-1.35 ccw(c58,0) 58,1.35 ccw(c58,0) 58,-1.35
Mechanical 15:
  lines w0.002: 58,-3 ccw(c58,0) 58,3 ccw(c58,0) 58,-3

## Text inside footprints (layer, text, board x,y; h text height)
J4: Top Overlay "+" at 20.142,-45.271 h2.03 r270